# Altium PCB SDC41_PCB.PcbDoc
Units mm, origin at the board's own origin, x right, y up, seen from the top; angles counter-clockwise.
Board outline 15.62 x 19.68 mm, 2 copper layers (Top Layer, Bottom Layer); 2 components, 0 nets, 11 pads, 0 vias.
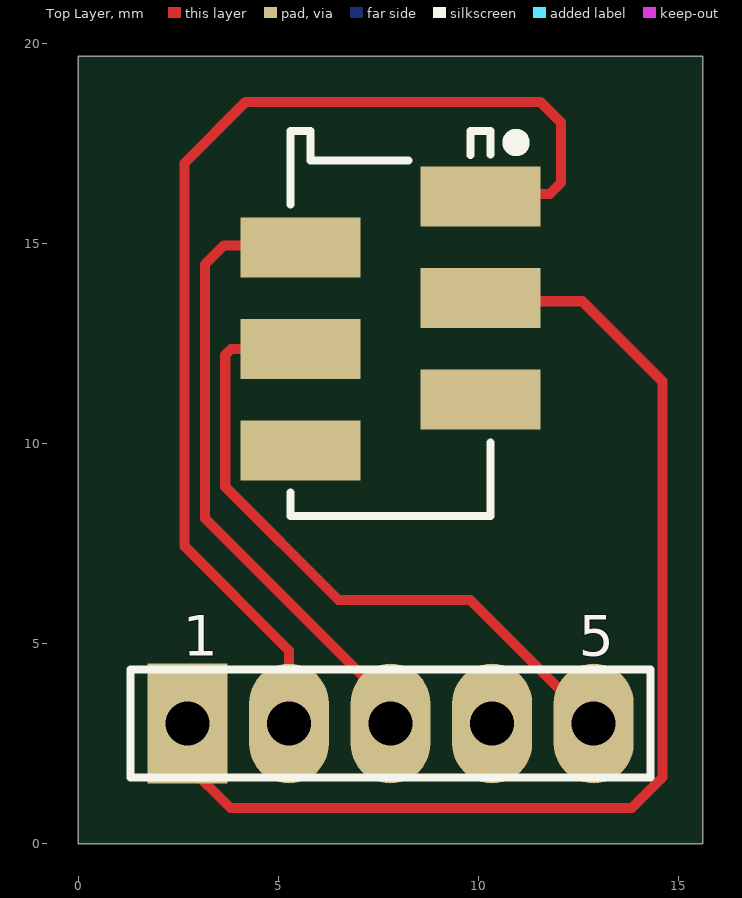
[diagram p0: Top Layer view]
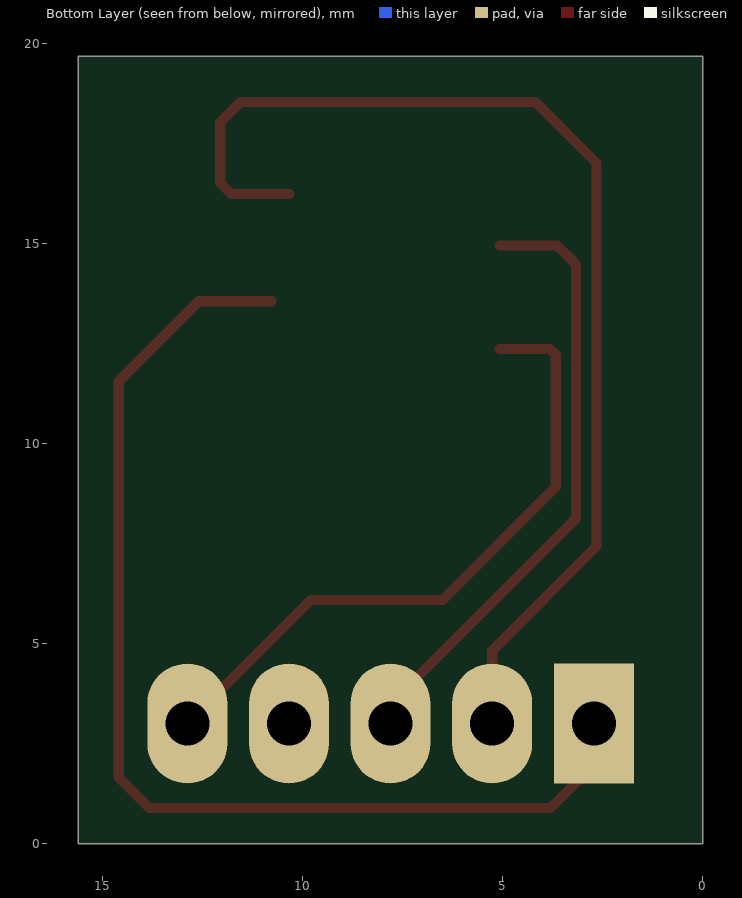
[diagram p1: Bottom Layer view, seen from below]

## Layer stack, top to bottom
Top Solder: solder mask 0.0102, Solder Resist, Dk 3.5
Top Layer: signal copper 0.0356
Dielectric 1: dielectric 0.32, FR-4, Dk 4.8
Bottom Layer: signal copper 0.0356
Bottom Solder: solder mask 0.0102, Solder Resist, Dk 3.5

## Board outline
0,0 15.621,0 15.621,19.685 0,19.685

## Design rules (kind name [scope] priority, off if disabled: settings)
Clearance [All] p1: gap=0.254 ignorepadtopadclearanceinfootprint=FALSE except(0: Arc-Hole Track-Hole SMDPad-Hole THPad-Hole Via-Hole Fill-Hole Poly-Hole Region-Hole Text-Hole)
PolygonConnect [All] p1: connectstyle=Relief reliefconductorwidth=0.254 reliefentries=4 polygonreliefangle="90 Angle" airgapwidth=0.254
RoutingVias [All] p1: holewidth=0.711 width=1.27 viastyle="Through Hole" minholewidth=0.711 minwidth=1.27 maxholewidth=0.711 maxwidth=1.27
SolderMaskExpansion [All] p1: expansion=0.102 istentingtop=FALSE
Width [All] p1: maxlimit=0.254 minlimit=0.254 preferedwidth=0.254
30 further rules are at their usual default settings.

## Components (designator, comment, footprint, x,y, rotation, side; value= is the part's Value field where it differs from the comment)
P? "61300511121" 61300511121 7.81,3 r0 top
? "Comment" 690367280676 7.81,13 r270 top

## Footprints (in the part's own frame and the unit in brackets; to place one, negate y for a bottom-side part, rotate by r counter-clockwise, add the part's x,y. Pads: shape width x height; smd on the part's side, far side on the other; paste and mask are expansions set on the pad)
61300511121 [mm] "Pin Header, pitch 2.54 mm, THT, Vertical, single row, 5p"
  rect 2x3 hole 1.1: 1(-5.08,0)
  oval 2x3 hole 1.1: 2(-2.54,0) 3(0,0) 4(2.54,0) 5(5.08,0)
  silkscreen extent -6.5,-1.35 6.5,1.35, body extent -6.35,-1.27 6.35,1.27, height 8.57
690367280676 [mm] "MiniModule Connectors, PCB Type, Female, SMT, Vertical, 6p"
  rect 1.5x3 smd: 1(-3.175,2.25) 2(-1.905,-2.25) 3(-0.635,2.25) 4(0.635,-2.25) 5(1.905,2.25) 6(3.175,-2.25)
  silkscreen extent -4.81,-2.5 4.81,3.23, body extent -4.8,-3.5 4.82,3.5, height 5.8

## Part data
P?: library part CMP-1502-01068-1, "THT Vertical Pin Header WR-PHD, Pitch 2.54 mm, Single Row, 5 pins", Contact Resistance=20mOhm, Manufacturer="Wurth Elektronik", Operating Temperature=-40to105degC, Rated Current=3A, Withstanding Voltage=500VAC, Working Voltage=250VAC, Datasheet URL=https://katalog.we-online.de/em/datasheet/6130xx11121.pdf, Gender=Male, Manufacturer URL=http://www.we-online.de, Mounting Technology=THT, Orientation=Vertical, Package Reference=61300511121, Packaging=Bag, Part Number=61300511121, Pin Number=5, Pitch=2.54mm, Publisher=WurthElektronik, Row Number=Single

## Nets (pads, with @x,y where several pads share a name; then routed paths per layer and width w, separated by ;. In a path a pad name is that pad's centre, name@x,y a point inside that pad or via, vN(x,y) a via of type N, cw(c..) or ccw(c..) an arc to the next point about the centre after c; other vN are vias at no path point)
pads on no net: ?.1 ?.2 ?.3 ?.4 ?.5 ?.6 P?.1 P?.2 P?.3 P?.4 P?.5
copper on no net: | length 88.8
  Top Layer w0.254: 2.751,2.979 2.751,1.948 3.81,0.889 13.843,0.889 14.605,1.651 14.605,11.557 12.605,13.557 10.795,13.557 ; 5.08,12.365 3.828,12.365 3.679,12.216 3.679,11.278 3.679,8.917 6.509,6.087 9.803,6.087 12.89,3 ; 5.08,14.954 3.647,14.954 3.171,14.478 3.171,8.132 7.81,3.493 7.81,3 ; 5.27,3 5.27,4.822 2.663,7.429 2.663,17.014 4.191,18.542 11.557,18.542 12.068,18.031 12.068,16.513 11.792,16.237 10.345,16.237

## Silkscreen, mask and mechanical layers (free items; w line width, h text height)
Mechanical 13:
  the board outline again, w1.2

## Text inside footprints (layer, text, board x,y; h text height)
P?: Top Overlay "5" at 12.51,4.7 h1.02; Top Overlay "1" at 2.61,4.7 h1.02